# Altium PCB FBD_11A.PCBDOC
Units mil, origin at the board's own origin, x right, y up, seen from the top; angles counter-clockwise.
Board outline 6850 x 4575 mil, 2 copper layers (TopLayer, BottomLayer); 87 components, 0 nets, 459 pads, 0 vias.
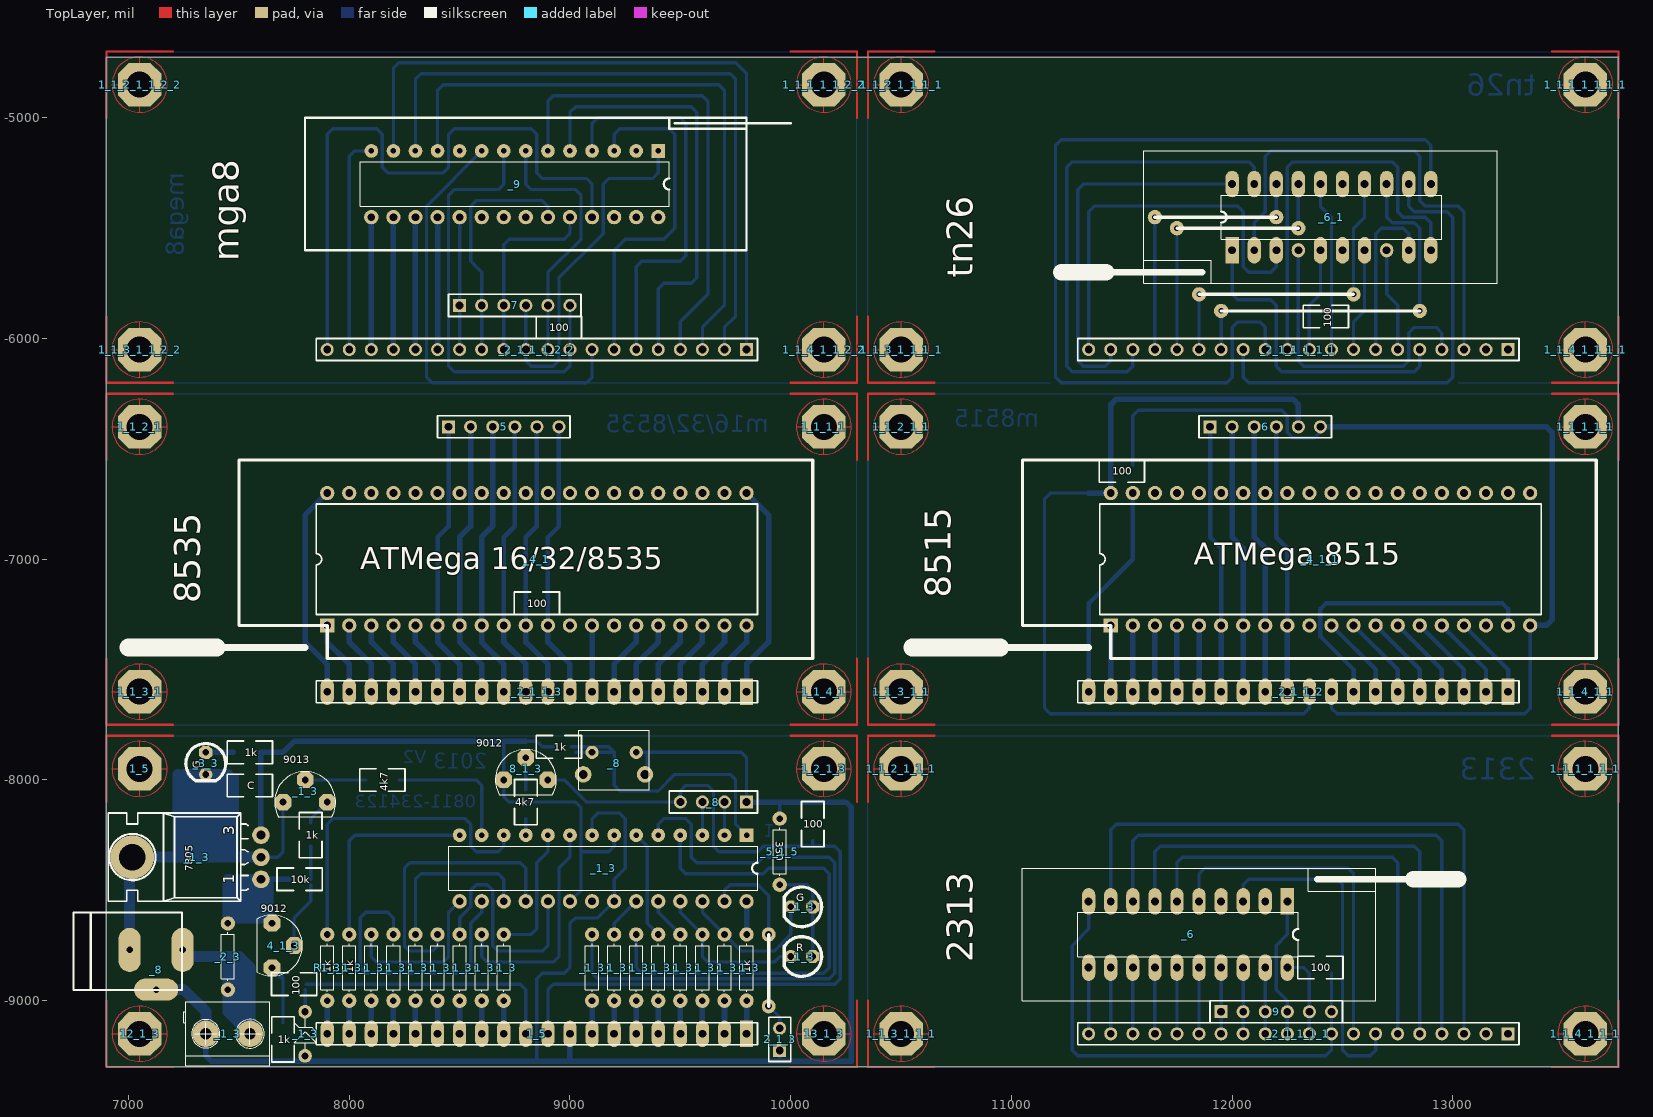
[diagram p0: TopLayer view]
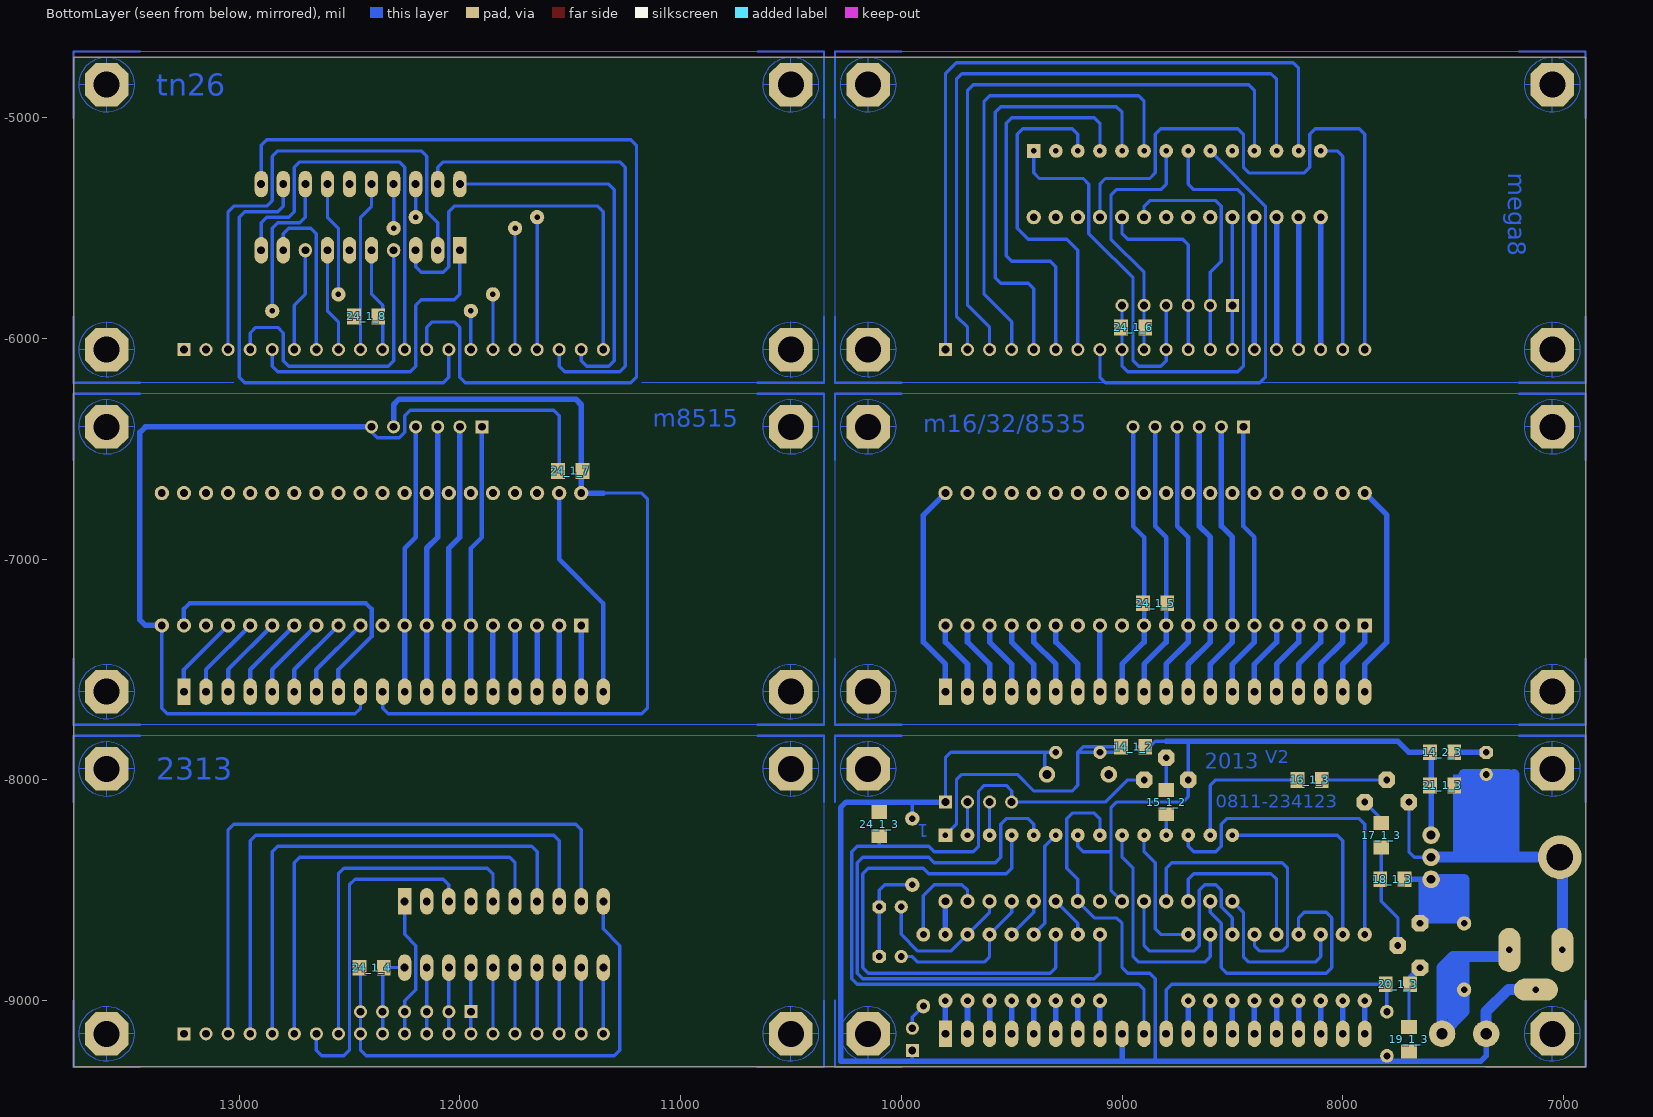
[diagram p1: BottomLayer view, seen from below]

## Layer stack, top to bottom
TopLayer: signal copper 1.4
Dielectric: dielectric 12.6, FR-4, Dk 4.8
BottomLayer: signal copper 1.4

## Board outline
6900,-4725 13750,-4725 13750,-9300 6900,-9300

## Design rules (kind name [scope] priority, off if disabled: settings)
Clearance [All] p1: gap=25
ComponentClearance [All] p1: gap=10 collisioncheckmode=0
PolygonConnect [All] p1: connectstyle=Relief reliefconductorwidth=10 reliefentries=4 polygonreliefangle="90 Angle"
RoutingLayers [All] p1: top layer=Horizontal bottom layer=Vertical
RoutingVias [All] p1: holewidth=28 width=50 viastyle="Through Hole" minholewidth=28 minwidth=50 maxholewidth=28 maxwidth=50
SolderMaskExpansion [All] p1: expansion=4
TestPointUsage [All] p1: valid=0 allowmultiple=FALSE
Testpoint [All] p1: side=15 testpointundercomponent=TRUE minsize=40 maxsize=100 preferedsize=60 minholesize=20 maxholesize=40 preferedholesize=32 testpointgrid=1 style=1023 order=1234567890
Width [All] p1: maxlimit=10 minlimit=10 preferedwidth=10
16 further rules are at their usual default settings.

## Components (designator, comment, footprint, x,y, rotation, side; value= is the part's Value field where it differs from the comment)
1_1_1_1 "CX" CORNER3 10150,-6400 r0 top
1_1_1_1_1 "CX" CORNER3 13600,-6400 r0 top
1_1_1_1_1_1 "CX" CORNER3 13600,-7950 r0 top
1_1_1_1_1_1_1 "CX" CORNER3 13600,-4850 r0 top
1_1_1_1_1_2_2 "CX" CORNER3 10150,-4850 r0 top
1_1_2_1 "CX" CORNER3 7050,-6400 r90 top
1_1_2_1_1 "CX" CORNER3 10500,-6400 r90 top
1_1_2_1_1_1 "CX" CORNER3 10500,-7950 r90 top
1_1_2_1_1_1_1 "CX" CORNER3 10500,-4850 r90 top
1_1_2_1_1_2_2 "CX" CORNER3 7050,-4850 r90 top
1_1_3_1 "CX" CORNER3 7050,-7600 r180 top
1_1_3_1_1 "CX" CORNER3 10500,-7600 r180 top
1_1_3_1_1_1 "CX" CORNER3 10500,-9150 r180 top
1_1_3_1_1_1_1 "CX" CORNER3 10500,-6050 r180 top
1_1_3_1_1_2_2 "CX" CORNER3 7050,-6050 r180 top
1_1_4_1 "CX" CORNER3 10150,-7600 r270 top
1_1_4_1_1 "CX" CORNER3 13600,-7600 r270 top
1_1_4_1_1_1 "CX" CORNER3 13600,-9150 r270 top
1_1_4_1_1_1_1 "CX" CORNER3 13600,-6050 r270 top
1_1_4_1_1_2_2 "CX" CORNER3 10150,-6050 r270 top
1_2_1_3 "CX" CORNER3 10150,-7950 r0 top
1_5 "CX" CORNER3 7050,-7950 r90 top
1_5 "" HDR1X20#1 9800,-9150 r180 top
2_1_3 "" HDR1X2 9950,-9225 r90 top
4_1_3 "9012" TO92-2 7650,-8650 r0 top
5 "" HDR1X6 8450,-6400 r0 top
6 "" HDR1X6 11900,-6400 r0 top
7 "" HDR1X6 8500,-5850 r0 top
8_1_3 "9012" TO92-2 8700,-8000 r90 top
9 "" HDR1X6 11950,-9050 r0 top
12_1_3 "CX" CORNER3 7050,-9150 r180 top
13_1_3 "CX" CORNER3 10150,-9150 r270 top
14_1_2 "1k" C3216-1206 8950,-7850 r180 top
14_2_3 "1k" C3216-1206 7550,-7875 r180 top
15_1_2 "4k7" C3216-1206 8800,-8100 r90 top
16_1_3 "4k7" C3216-1206 8150,-8000 r0 top
17_1_3 "1k" C3216-1206 7825,-8250 r90 top
18_1_3 "10k" C3216-1206 7775,-8450 r0 top
19_1_3 "1k" C3216-1206 7700,-9175 r90 top
20_1_3 "100" C3216-1206 7750,-8925 r180 top
21_1_3 "C" C3216-1206 7550,-8025 r180 top
24_1_3 "100" C3216-1206 10100,-8200 r90 top
24_1_4 "100" C3216-1206 12400,-8850 r180 top
24_1_5 "100" C3216-1206 8850,-7200 r180 top
24_1_6 "100" C3216-1206 8950,-5950 r180 top
24_1_7 "100" C3216-1206 11500,-6600 r180 top
24_1_8 "100" C3216-1206 12425,-5900 r0 top
_1_3 "" TERMINAL2P 7350,-9150 r270 top
_1_3 "9013" TO92-2 7700,-8100 r90 top
_1_3 "7805" TO220H 7600,-8450 r90 top
_1_3 "R" LED1 10100,-8800 r90 top
_1_3 "G" LED1 10100,-8575 r90 top
_1_3 "" DIP28S 9800,-8250 r270 top
_1_3 "1k" AXIAL0.3 8000,-9000 r90 top
_1_3 "" AXIAL0.3 8100,-9000 r90 top
_1_3 "" AXIAL0.3 8200,-9000 r90 top
_1_3 "" AXIAL0.3 8300,-9000 r90 top
_1_3 "" AXIAL0.3 8400,-9000 r90 top
_1_3 "" AXIAL0.3 8500,-9000 r90 top
_1_3 "" AXIAL0.3 8600,-9000 r90 top
_1_3 "" AXIAL0.3 8700,-9000 r90 top
_1_3 "1k" AXIAL0.3 9800,-9000 r90 top
_1_3 "" AXIAL0.3 9700,-9000 r90 top
_1_3 "" AXIAL0.3 9600,-9000 r90 top
_1_3 "" AXIAL0.3 9500,-9000 r90 top
_1_3 "" AXIAL0.3 9400,-9000 r90 top
_1_3 "" AXIAL0.3 9300,-9000 r90 top
_1_3 "" AXIAL0.3 9200,-9000 r90 top
_1_3 "" AXIAL0.3 9100,-9000 r90 top
_1_3 "" DZ2 7800,-9250 r90 top
_2_1_1_1_1 "" HDR1X20#2 13250,-9150 r180 top
_2_1_1_1_1_1 "" HDR1X20#2 13250,-6050 r180 top
_2_1_1_1_2_2 "" HDR1X20#2 9800,-6050 r180 top
_2_1_1_2 "" HDR1X20#1 13250,-7600 r180 top
_2_1_1_3 "" HDR1X20#1 9800,-7600 r180 top
_2_3 "" AXIAL0.3 7450,-8950 r90 top
_3_3 "G" LED1 7350,-7875 r180 top
_4_1 "ATMega 16/32/8535" "DIP40 - ZIP" 7900,-7300 r90 top
_4_1_1 "ATMega 8515" "DIP40 - ZIP" 11450,-7300 r90 top
_5_1_5 "330" AXIAL0.3 9950,-8175 r270 top
_6 "" DIP20TT#1 12250,-8550 r270 top
_6_1 "" DIP20TT#2 12000,-5600 r90 top
_8 "" SW5_SIDE 9300,-7875 r180 top
_8 "" DCPL1 7125,-8950 r90 top
_8 "" HDR1X4 9800,-8100 r180 top
_9 "" DIP28S 9400,-5150 r270 top
R1_3 "1k" AXIAL0.3 7900,-9000 r90 top

## Footprints (in the part's own frame and the unit in brackets; to place one, negate y for a bottom-side part, rotate by r counter-clockwise, add the part's x,y. Pads: shape width x height; smd on the part's side, far side on the other; paste and mask are expansions set on the pad)
AXIAL0.3 [mil]
  round 65 hole 30: 1(0,0) 2(300,0)
  silkscreen extent 41,-30 259,30
C3216-1206 [mm]
  rect 1.6x1.8 smd far side: 1(-1.4,0) 2(1.4,0)
  silkscreen extent -2.6,-1.3 2.6,1.3
CORNER3 [mm]
  oct 5x5 hole 3: +(0,0)
  MultiLayer circle w0.127: c0,0 r3.175
  MultiLayer lines w0.127: -3.175,0 -1.905,0 ; 0,-3.175 0,-1.905 ; 0,1.905 0,3.175 ; 1.905,0 3.175,0
  MultiLayer lines w0.254: -3.81,3.81 3.81,3.81 3.81,-3.81
DCPL1 [mil]
  oval 100x200 hole 30: 0(0,0)
  oval 200x100 hole 30: 1(180,-120) 2(180,120)
  silkscreen extent -1,-117 349,374
DIP20TT#1 [mil]
  rect 120x60 hole 36: 1(0,0)
  oval 120x60 hole 36: 2(0,-100) 3(0,-200) 4(0,-300) 5(0,-400) 6(0,-500) 7(0,-600) 8(0,-700) 9(0,-800) 10(0,-900) 11(300,-900) 12(300,-800) 13(300,-700) 14(300,-600) 15(300,-500) 16(300,-400) 17(300,-300) 18(300,-200) 19(300,-100) 20(300,0)
  silkscreen extent -150,-1200 450,775
DIP20TT#2 [mil]
  rect 120x60 hole 36: 1(0,0)
  oval 120x60 hole 36: 2(0,-100) 3(0,-200) 5(0,-400) 6(0,-500) 7(0,-600) 9(0,-800) 10(0,-900) 11(300,-900) 12(300,-800) 13(300,-700) 14(300,-600) 15(300,-500) 16(300,-400) 17(300,-300) 18(300,-200) 19(300,-100) 20(300,0)
  oval 65x60 hole 36: 4(0,-300) 8(0,-700)
  silkscreen extent -150,-1200 450,775
DIP28S [mil]
  rect 62x62 hole 25: 1(0,0)
  round 62 hole 25: 2(0,-100) 3(0,-200) 4(0,-300) 5(0,-400) 6(0,-500) 7(0,-600) 8(0,-700) 9(0,-800) 10(0,-900) 11(0,-1000) 12(0,-1100) 13(0,-1200) 14(0,-1300)
  round 65 hole 35: 15(300,-1300) 16(300,-1200) 17(300,-1100) 18(300,-1000) 19(300,-900) 20(300,-800) 21(300,-700) 22(300,-600) 23(300,-500) 24(300,-400) 25(300,-300) 26(300,-200) 27(300,-100) 28(300,0)
  silkscreen extent 50,-1350 250,50
"DIP40 - ZIP" [mil]
  rect 65x65 hole 35: 1(0,0)
  round 65 hole 35: 2(0,-100) 3(0,-200) 4(0,-300) 5(0,-400) 6(0,-500) 7(0,-600) 8(0,-700) 9(0,-800) 10(0,-900) 11(0,-1000) 12(0,-1100) 13(0,-1200) 14(0,-1300) 15(0,-1400) 16(0,-1500) 17(0,-1600) 18(0,-1700) 19(0,-1800) 20(0,-1900) 21(600,-1900) 22(600,-1800) 23(600,-1700) 24(600,-1600) 25(600,-1500) 26(600,-1400) 27(600,-1300) 28(600,-1200) 29(600,-1100) 30(600,-1000) 31(600,-900) 32(600,-800) 33(600,-700) 34(600,-600) 35(600,-500) 36(600,-400) 37(600,-300) 38(600,-200) 39(600,-100) 40(600,0)
  silkscreen extent -150,-2200 750,900
DZ2 [mil]
  round 62 hole 32: 1(0,0) 2(200,0)
  silkscreen extent 30,-50 170,50
HDR1X2 [mm]
  rect 1.5x1.5 hole 0.9: 1(0,0)
  round 1.5 hole 0.9: 2(2.54,0)
  silkscreen extent -1.27,-1.27 3.81,1.27
HDR1X4 [mm]
  rect 1.5x1.5 hole 0.9: 1(0,0)
  round 1.5 hole 0.9: 2(2.54,0) 3(5.08,0) 4(7.62,0)
  silkscreen extent -1.27,-1.27 8.89,1.27
HDR1X6 [mm]
  rect 1.5x1.5 hole 0.9: 1(0,0)
  round 1.5 hole 0.9: 2(2.54,0) 3(5.08,0) 4(7.62,0) 5(10.16,0) 6(12.7,0)
  silkscreen extent -1.27,-1.27 13.97,1.27
HDR1X20#1 [mil]
  rect 60x120 hole 35.43: 1(0,0)
  oval 60x120 hole 35.43: 2(100,0) 3(200,0) 4(300,0) 5(400,0) 6(500,0) 7(600,0) 8(700,0) 9(800,0) 10(900,0) 11(1000,0) 12(1100,0) 13(1200,0) 14(1300,0) 15(1400,0) 16(1500,0) 17(1600,0) 18(1700,0) 19(1800,0) 20(1900,0)
  silkscreen extent -50,-50 1950,50
HDR1X20#2 [mil]
  rect 59.06x59.06 hole 35.43: 1(0,0)
  round 59.06 hole 35.43: 2(100,0) 3(200,0) 4(300,0) 5(400,0) 6(500,0) 7(600,0) 8(700,0) 9(800,0) 10(900,0) 11(1000,0) 12(1100,0) 13(1200,0) 14(1300,0) 15(1400,0) 16(1500,0) 17(1600,0) 18(1700,0) 19(1800,0) 20(1900,0)
  silkscreen extent -50,-50 1950,50
LED1 [mil]
  oct 60x60 hole 30: A(0,0)
  round 60 hole 30: K(0,100)
  silkscreen extent -90,-40 90,129
SW5_SIDE [mil]
  round 75 hole 40: 0(-40,100) 1(240,100)
  round 60 hole 30: 0(0,0) 1(200,0)
  silkscreen extent -60,-100 260,170
TERMINAL2P [mil]
  round 120 hole 51.18: 1(0,0) 3(0,200)
  silkscreen extent -145,-100 145,290
TO92-2 [mil]
  oct 75x75 hole 30: B(100,-100) c(0,-200) e(0,0)
  silkscreen extent -68,-238 138,38
TO220H [mil]
  round 196.85 hole 118.11: 0(100,583.33)
  round 80 hole 40: 1(0,0) 2(100,0) 3(200,0)
  silkscreen extent -100,59 300,692

## Free pads (board coordinates)
  oval 62x65 hole 32: 0(9900,-8700) 1(9900,-9025)
  round 65 hole 25: 0(12300,-5500) 1(11750,-5500) 2(12200,-5450) 3(11650,-5450) 4(11850,-5800) 5(12550,-5800) 6(12550,-5800) 7(11950,-5875) 8(12850,-5875)

## Nets (pads, with @x,y where several pads share a name; then routed paths per layer and width w, separated by ;. In a path a pad name is that pad's centre, name@x,y a point inside that pad or via, vN(x,y) a via of type N, cw(c..) or ccw(c..) an arc to the next point about the centre after c; other vN are vias at no path point)
pads on no net: 1_1_1_1.+ 1_1_1_1_1.+ 1_1_1_1_1_1.+ 1_1_1_1_1_1_1.+ 1_1_1_1_1_2_2.+ 1_1_2_1.+ 1_1_2_1_1.+ 1_1_2_1_1_1.+ 1_1_2_1_1_1_1.+ 1_1_2_1_1_2_2.+ 1_1_3_1.+ 1_1_3_1_1.+ 1_1_3_1_1_1.+ 1_1_3_1_1_1_1.+ 1_1_3_1_1_2_2.+ 1_1_4_1.+ 1_1_4_1_1.+ 1_1_4_1_1_1.+ 1_1_4_1_1_1_1.+ 1_1_4_1_1_2_2.+ 1_2_1_3.+ 1_5.1 1_5.2 1_5.3 1_5.4 1_5.5 1_5.6 1_5.7 1_5.8 1_5.9 1_5.10 1_5.11 1_5.12 1_5.13 1_5.14 1_5.15 1_5.16 1_5.17 1_5.18 1_5.19 1_5.20 1_5.+ 2_1_3.1 2_1_3.2 4_1_3.B 4_1_3.c 4_1_3.e 5.1 5.2 5.3 5.4 5.5 5.6 6.1 6.2 6.3 6.4 6.5 6.6 7.1 7.2 7.3 7.4 7.5 7.6 8_1_3.B 8_1_3.c 8_1_3.e 9.1 9.2 9.3 9.4 9.5 9.6 12_1_3.+ 13_1_3.+ 14_1_2.1 14_1_2.2 14_2_3.1 14_2_3.2 15_1_2.1 15_1_2.2 16_1_3.1 16_1_3.2 17_1_3.1 17_1_3.2 18_1_3.1 18_1_3.2 19_1_3.1 19_1_3.2 20_1_3.1 20_1_3.2 21_1_3.1 21_1_3.2 24_1_3.1 24_1_3.2 24_1_4.1 24_1_4.2 24_1_5.1 24_1_5.2 24_1_6.1 24_1_6.2 24_1_7.1 24_1_7.2 24_1_8.1 24_1_8.2 _1_3.0 _1_3.1 _1_3.2 _1_3.3 _1_3.4 _1_3.5 _1_3.6 _1_3.7 _1_3.8 _1_3.9 _1_3.10 _1_3.11 _1_3.12 _1_3.13 _1_3.14 _1_3.15 _1_3.16 _1_3.17 _1_3.18 _1_3.19 _1_3.20 _1_3.21 _1_3.22 _1_3.23 _1_3.24 _1_3.25 _1_3.26 _1_3.27 _1_3.28 _1_3.A _1_3.B _1_3.c _1_3.e _1_3.K _2_1_1_1_1.1 _2_1_1_1_1.2 _2_1_1_1_1.3 _2_1_1_1_1.4 _2_1_1_1_1.5 _2_1_1_1_1.6 _2_1_1_1_1.7 _2_1_1_1_1.8 _2_1_1_1_1.9 _2_1_1_1_1.10 _2_1_1_1_1.11 _2_1_1_1_1.12 _2_1_1_1_1.13 _2_1_1_1_1.14 _2_1_1_1_1.15 _2_1_1_1_1.16 _2_1_1_1_1.17 _2_1_1_1_1.18 _2_1_1_1_1.19 _2_1_1_1_1.20 _2_1_1_1_1_1.1 _2_1_1_1_1_1.2 _2_1_1_1_1_1.3 _2_1_1_1_1_1.4 _2_1_1_1_1_1.5 _2_1_1_1_1_1.6 _2_1_1_1_1_1.7 _2_1_1_1_1_1.8 _2_1_1_1_1_1.9 _2_1_1_1_1_1.10 _2_1_1_1_1_1.11 _2_1_1_1_1_1.12 _2_1_1_1_1_1.13 _2_1_1_1_1_1.14 _2_1_1_1_1_1.15 _2_1_1_1_1_1.16 _2_1_1_1_1_1.17 _2_1_1_1_1_1.18 _2_1_1_1_1_1.19 _2_1_1_1_1_1.20 _2_1_1_1_2_2.1 _2_1_1_1_2_2.2 _2_1_1_1_2_2.3 _2_1_1_1_2_2.4 _2_1_1_1_2_2.5 _2_1_1_1_2_2.6 _2_1_1_1_2_2.7 _2_1_1_1_2_2.8 _2_1_1_1_2_2.9 _2_1_1_1_2_2.10 _2_1_1_1_2_2.11 _2_1_1_1_2_2.12 _2_1_1_1_2_2.13 _2_1_1_1_2_2.14 _2_1_1_1_2_2.15 _2_1_1_1_2_2.16 _2_1_1_1_2_2.17 _2_1_1_1_2_2.18 _2_1_1_1_2_2.19 _2_1_1_1_2_2.20 _2_1_1_2.1 _2_1_1_2.2 _2_1_1_2.3 _2_1_1_2.4 _2_1_1_2.5 _2_1_1_2.6 _2_1_1_2.7 _2_1_1_2.8 _2_1_1_2.9 _2_1_1_2.10 _2_1_1_2.11 _2_1_1_2.12 _2_1_1_2.13 _2_1_1_2.14 _2_1_1_2.15 _2_1_1_2.16 _2_1_1_2.17 _2_1_1_2.18 _2_1_1_2.19 _2_1_1_2.20 _2_1_1_3.1 _2_1_1_3.2 _2_1_1_3.3 _2_1_1_3.4 _2_1_1_3.5 _2_1_1_3.6 _2_1_1_3.7 _2_1_1_3.8 _2_1_1_3.9 _2_1_1_3.10 _2_1_1_3.11 _2_1_1_3.12 _2_1_1_3.13 _2_1_1_3.14 _2_1_1_3.15 _2_1_1_3.16 _2_1_1_3.17 _2_1_1_3.18 _2_1_1_3.19 _2_1_1_3.20 _2_3.1 _2_3.2 _3_3.A _3_3.K _4_1.1 _4_1.2 _4_1.3 _4_1.4 _4_1.5 _4_1.6 _4_1.7 _4_1.8 _4_1.9 _4_1.10 _4_1.11 _4_1.12 _4_1.13 _4_1.14 _4_1.15 _4_1.16 _4_1.17 _4_1.18 _4_1.19 _4_1.20 _4_1.21 _4_1.22 _4_1.23 _4_1.24 _4_1.25 _4_1.26 _4_1.27 _4_1.28 _4_1.29 _4_1.30 _4_1.31 _4_1.32 _4_1.33 _4_1.34 _4_1.35 _4_1.36 _4_1.37 _4_1.38 _4_1.39 _4_1.40 _4_1_1.1 _4_1_1.2 _4_1_1.3 _4_1_1.4 _4_1_1.5 _4_1_1.6 _4_1_1.7 _4_1_1.8 _4_1_1.9 _4_1_1.10 _4_1_1.11 _4_1_1.12 _4_1_1.13 _4_1_1.14 _4_1_1.15 _4_1_1.16 _4_1_1.17 _4_1_1.18 _4_1_1.19 _4_1_1.20 _4_1_1.21 _4_1_1.22 _4_1_1.23 _4_1_1.24 _4_1_1.25 _4_1_1.26 _4_1_1.27 _4_1_1.28 _4_1_1.29 _4_1_1.30 _4_1_1.31 _4_1_1.32 _4_1_1.33 _4_1_1.34 _4_1_1.35 _4_1_1.36 _4_1_1.37 _4_1_1.38 _4_1_1.39 _4_1_1.40 _5_1_5.1 _5_1_5.2 _6.1 _6.2 _6.3 _6.4 _6.5 _6.6 _6.7 _6.8 _6.9 _6.10 _6.11 _6.12 _6.13 _6.14 _6.15 _6.16 _6.17 _6.18 _6.19 _6.20 _6_1.1 _6_1.2 _6_1.3 _6_1.4 _6_1.5 _6_1.6 _6_1.7 _6_1.8 _6_1.9 _6_1.10 _6_1.11 _6_1.12 _6_1.13 _6_1.14 _6_1.15 _6_1.16 _6_1.17 _6_1.18 _6_1.19 _6_1.20 _8.0 _8.1 _8.2 _8.3 _8.4 _9.1 _9.2 _9.3 _9.4 _9.5 _9.6 _9.7 _9.8 _9.9 _9.10 _9.11 _9.12 _9.13 _9.14 _9.15 _9.16 _9.17 _9.18 _9.19 _9.20 _9.21 _9.22 _9.23 _9.24 _9.25 _9.26 _9.27 _9.28 R1_3.1 R1_3.2
copper on no net: | length 192600.4
  BottomLayer w5: 6900,-9000 6900,-8075 ; 6900,-7475 6900,-6550 ; 6900,-5900 6900,-5000 ; 7200,-7800 10000,-7800 ; 7200,-7750 10025,-7750 ; 7200,-6250 10000,-6250 ; 7200,-6200 10000,-6200 ; 7200,-4700 10000,-4700 ; 10300,-7450 10300,-6550 ; 10300,-5900 10300,-5000 ; 10350,-9000 10350,-8100 ; 10350,-5900 10350,-5000 ; 10650,-9300 13450,-9300 ; 10650,-7800 13450,-7800 ; 10650,-7750 13450,-7750 ; 10650,-6250 13450,-6250 ; 10650,-6200 11175,-6200 ; 10650,-4700 13450,-4700 ; 13025,-6200 13450,-6200 ; 13750,-9000 13750,-8100 ; 13750,-7450 13750,-6550 ; 13750,-5900 13750,-5000
  BottomLayer w10: 7200,-9300 7350,-9300 ; 10350,-7450 10350,-6550
  BottomLayer w15: 7600,-8450 7625,-8450 ; 7605.12,-8355.12 7600,-8350 7675,-8350 7700,-8325 7700,-8100 ; 7650,-8850 7700,-8900 7700,-9100 ; 7650,-8650 7650,-8625 7650,-8444.88 ; 7750,-8750 7750,-8625 7825,-8550 7825,-8475 ; 7800,-9050 7800,-8950 ; 7800,-8000 8075,-8000 ; 7805.12,-8925 8775,-8925 8800,-8950 8800,-9150 ; 7825,-8450 7825,-8300 ; 7825,-8194.88 7825,-8175 7900,-8100 ; 7900,-8700 7900,-8200 7925,-8175 8525,-8175 8550,-8200 8550,-8300 8575,-8325 8675,-8325 8700,-8300 8700,-8250 ; 7900,-6050 7900,-5075 7925,-5050 8125,-5050 8150,-5075 8150,-5225 8175,-5250 8425,-5250 8450,-5225 8450,-5075 8475,-5050 8825,-5050 8850,-5075 8850,-5250 8875,-5275 9075,-5275 9100,-5300 9100,-5350 9100,-5450 ; 8000,-8700 8000,-8550 8000,-8275 8025,-8250 8500,-8250 ; 8000,-6050 8000,-5175 8025,-5150 8100,-5150 ; 8100,-8700 8100,-8800 8125,-8825 8425,-8825 8450,-8800 8450,-8600 8500,-8550 ; 8200,-8700 8200,-8625 8175,-8600 8075,-8600 8050,-8625 8050,-8850 8075,-8875 8525,-8875 8550,-8850 8550,-8650 8600,-8600 8600,-8550 ; 8200,-5150 8200,-4775 8225,-4750 9750,-4750 9800,-4800 9800,-5975 9800,-6050 ; 8225,-8000 8575,-8000 8600,-8025 8600,-8250 ; 8300,-8700 8300,-8450 8325,-8425 8675,-8425 8700,-8450 8700,-8550 ; 8300,-5150 8300,-4825 8325,-4800 9725,-4800 9750,-4825 9750,-5900 9700,-5950 9700,-6050 ; 8400,-8700 8400,-8750 8375,-8775 8275,-8775 8250,-8750 8250,-8400 8275,-8375 8775,-8375 8800,-8400 8800,-8550 ; 8400,-5150 8400,-4875 8425,-4850 9675,-4850 9700,-4875 9700,-5850 9600,-5950 9600,-6050 ; 8500,-8700 8500,-8625 8550,-8575 8550,-8500 8575,-8475 8625,-8475 8650,-8500 8650,-8750 8675,-8775 8875,-8775 8900,-8750 8900,-8550 ; 8500,-6050 8500,-5450 ; 8600,-8700 8600,-8750 8600,-8800 8625,-8825 8925,-8825 8950,-8800 8950,-8400 9000,-8350 9000,-8250 ; 8600,-6050 8600,-5700 8550,-5650 8550,-5400 8575,-5375 8875,-5375 8900,-5400 8900,-5450 ; 8600,-5150 8350,-5400 8350,-6175 8375,-6200 9075,-6200 9100,-6175 9100,-6050 ; 8700,-8700 8825,-8700 8850,-8675 8850,-8375 8900,-8325 8900,-8250 ; 8700,-8050 8700,-7825 ; 8700,-8025 8700,-8075 8725,-8100 9025,-8100 9050,-8125 9050,-8350 ; 8700,-6050 8700,-5575 8725,-5550 8975,-5550 9000,-5525 9000,-5450 ; 8700,-5150 8700,-5300 8675,-5325 8475,-5325 8450,-5350 8450,-6125 8475,-6150 8975,-6150 9000,-6125 9000,-5850 ; 8800,-8250 8800,-8175 ; 8800,-8044.88 8800,-7900 ; 8800,-7825 8850,-7825 8875,-7850 8925,-7850 ; 8800,-5850 8800,-6100 8825,-6125 8925,-6125 8950,-6100 8950,-5725 9125,-5550 9150,-5525 9150,-5300 9175,-5275 9375,-5275 9400,-5250 9400,-5150 ; 8800,-5150 8800,-5300 8825,-5325 9025,-5325 9050,-5350 9050,-5550 8900,-5700 8900,-6050 ; 8850,-9275 8850,-8900 8875,-8875 8975,-8875 9000,-8850 9000,-8650 9025,-8625 9125,-8625 9200,-8550 9200,-8450 9250,-8400 9250,-8175 9225,-8150 9125,-8150 9100,-8175 9100,-8250 ; 8900,-9150 8900,-8950 8925,-8925 10200,-8925 10225,-8900 10225,-8325 10200,-8300 9875,-8300 9850,-8325 9675,-8325 9650,-8300 9650,-8050 9625,-8025 9525,-8025 9500,-8050 9500,-8100 9075,-8100 8975,-8000 8900,-8000 ; 8900,-5150 8900,-4925 8925,-4900 9600,-4900 9625,-4925 9625,-5800 9500,-5925 9500,-6050 ; 9000,-8550 9050,-8500 9050,-8350 ; 9000,-5150 9000,-4975 9025,-4950 9550,-4950 9575,-4975 9575,-5725 9550,-5750 9425,-5750 9400,-5775 9400,-6050 ; 9005.12,-7850 9175,-7850 9200,-7875 ; 9025,-7875 9200,-7875 ; 9050,-8325 9175,-8325 9200,-8300 9200,-8250 ; 9050,-8300 9050,-8350 ; 9100,-8700 9100,-8875 9125,-8900 10175,-8900 10200,-8875 10200,-8375 10175,-8350 9875,-8350 9850,-8375 9575,-8375 9550,-8350 9550,-8200 9525,-8175 9425,-8175 9400,-8200 9400,-8250 ; 9100,-5150 9100,-5025 9125,-5000 9500,-5000 9525,-5025 9525,-5625 9500,-5650 9325,-5650 9300,-5675 9300,-6050 ; 9200,-8700 9200,-8650 9300,-8550 ; 9200,-6050 9200,-5600 9250,-5550 9425,-5550 9475,-5500 9475,-5075 9450,-5050 9225,-5050 9200,-5075 9200,-5150 ; 9300,-8700 9300,-8850 9325,-8875 10150,-8875 10175,-8850 10175,-8425 10150,-8400 9900,-8400 9875,-8425 9525,-8425 9500,-8400 9500,-8250 ; 9300,-8250 9350,-8300 9350,-8650 9400,-8700 ; 9300,-7875 9775,-7875 9800,-7900 9800,-8100 ; 9350,-7990 9350,-7875 ; 9400,-8550 9400,-8600 9500,-8700 ; 9500,-8550 9500,-8600 9600,-8700 9600,-8800 9625,-8825 9925,-8825 9950,-8800 10000,-8800 ; 9600,-8550 9600,-8600 9700,-8700 9775,-8775 9875,-8775 9925,-8775 10000,-8700 10000,-8575 ; 9600,-8250 9600,-8100 ; 9700,-8550 9700,-8500 9725,-8475 9850,-8475 9900,-8525 9900,-8700 ; 9700,-8250 9700,-8100 ; 9800,-8250 9750,-8200 9750,-8000 9725,-7975 9475,-7975 9400,-8050 9225,-8050 9200,-8025 9200,-7875 ; 9900,-9025 9950,-9075 9950,-9125 ; 9950,-9275 9950,-9225 ; 9950,-8475 10075,-8475 10100,-8500 10100,-8800 ; 9950,-8175 9950,-8100 ; 10100,-8300 10100,-8275 ; 11350,-9150 11350,-8850 ; 11350,-8550 11350,-8675 11275,-8750 11275,-9225 11300,-9250 12425,-9250 12450,-9225 12450,-8875 ; 11350,-6700 11175,-6700 11150,-6725 11150,-7675 11175,-7700 12325,-7700 12350,-7675 12350,-7600 ; 11350,-6050 11350,-5425 11375,-5400 12025,-5400 12050,-5425 12050,-5675 12075,-5700 12175,-5700 12200,-5675 12200,-5600 ; 11450,-9150 11450,-8850 ; 11450,-8550 11450,-8225 11475,-8200 13025,-8200 13050,-8225 13050,-9150 ; 11450,-6050 11450,-6100 11425,-6125 11325,-6125 11300,-6100 11300,-5325 11325,-5300 12000,-5300 ; 11550,-9150 11550,-8850 ; 11550,-8550 11550,-8275 11575,-8250 12925,-8250 12950,-8275 12950,-9150 ; 11550,-6575 11550,-6350 11575,-6325 12225,-6325 12250,-6350 12250,-6425 12275,-6450 12375,-6450 12400,-6425 12400,-6400 ; 11550,-6050 11550,-6125 11525,-6150 11275,-6150 11250,-6125 11250,-5225 11275,-5200 12075,-5200 12100,-5225 12100,-5300 ; 11650,-9150 11650,-8850 ; 11650,-8550 11650,-8325 11675,-8300 12825,-8300 12850,-8325 12850,-9150 ; 11650,-6050 11650,-5450 ; 11750,-9150 11750,-8850 ; 11750,-8550 11750,-8375 11775,-8350 12725,-8350 12750,-8375 12750,-9150 ; 11750,-6050 11750,-5500 ; 11825,-5800 11850,-5825 11850,-6050 ; 11850,-9150 11850,-8850 ; 11850,-8550 11850,-8425 11875,-8400 12525,-8400 12550,-8425 12550,-8475 12550,-9150 ; 11950,-9150 11950,-8850 ; 11950,-6050 11950,-5875 ; 12000,-5600 12000,-5800 12025,-5825 12175,-5825 12200,-5850 12200,-6125 12225,-6150 12825,-6150 12850,-6125 12850,-6050 ; 12050,-9150 12050,-8850 ; 12050,-8550 12050,-8475 12075,-8450 12475,-8450 12500,-8475 12500,-9225 12525,-9250 12625,-9250 12650,-9225 12650,-9150 ; 12050,-6050 12050,-6175 12075,-6200 12975,-6200 13000,-6175 13000,-5450 12975,-5425 12825,-5425 12800,-5400 12800,-5300 ; 12100,-5600 12100,-5475 12150,-5425 12150,-5175 12175,-5150 12825,-5150 12850,-5175 12850,-5375 12875,-5400 13025,-5400 13050,-5425 13050,-6050 ; 12150,-9150 12150,-8850 ; 12150,-6050 12150,-5950 12125,-5925 12025,-5925 12000,-5950 12000,-6175 11975,-6200 11225,-6200 11200,-6175 11200,-5125 11225,-5100 12875,-5100 12900,-5125 12900,-5300 ; 12200,-5450 12200,-5275 ; 12250,-9150 12250,-9000 12200,-8950 12200,-8750 12250,-8700 12250,-8550 ; 12250,-8850 12325,-8850 12350,-8875 12350,-9150 ; 12250,-6050 12250,-5225 12275,-5200 12725,-5200 12750,-5225 12750,-5425 12775,-5450 12875,-5450 12900,-5475 12900,-5600 ; 12300,-5600 12300,-6100 12325,-6125 12775,-6125 12800,-6100 12800,-5975 12825,-5950 12925,-5950 12950,-5975 12950,-6050 ; 12300,-5500 12300,-5300 ; 12350,-6050 12350,-5850 12400,-5800 12400,-5600 ; 12400,-5300 12400,-5400 12450,-5450 12450,-6050 ; 12450,-7600 12450,-7675 12475,-7700 13325,-7700 13350,-7675 13350,-7300 ; 12550,-6050 12550,-5925 12600,-5875 12600,-5600 ; 12550,-5775 12550,-5500 12600,-5450 12600,-5300 ; 12650,-6050 12650,-5525 12675,-5500 12775,-5500 12800,-5525 12800,-5600 ; 12700,-5600 12700,-5800 12750,-5850 12750,-6050 ; 12700,-5300 12700,-5450 12725,-5475 12825,-5475 12850,-5500 12850,-5875
  BottomLayer w20: 8400,-7300 8400,-6900 8450,-6850 8450,-6400 ; 8700,-7300 8700,-6900 8750,-6850 8750,-6400 ; 8800,-7300 8800,-6900 8850,-6850 8850,-6400 ; 8900,-7300 8900,-6900 8950,-6850 8950,-6400 ; 11350,-7600 11350,-7200 11550,-7000 11550,-6700 ; 11900,-6400 11900,-6900 11950,-6950 11950,-7300 ; 12200,-6400 12200,-6900 12250,-6950 12250,-7275 ; 12450,-7300 12650,-7500 12650,-7600 ; 12550,-7600 12550,-7500 12400,-7350 12400,-7225 12425,-7200 13225,-7200 13250,-7225 13250,-7300 ; 12550,-7300 12750,-7500 12750,-7600 ; 12650,-7300 12850,-7500 12850,-7600 ; 12750,-7300 12950,-7500 12950,-7575 ; 12850,-7300 13050,-7500 13050,-7600 ; 12950,-7300 13150,-7500 13150,-7600 ; 13050,-7300 13250,-7500 13250,-7575
  BottomLayer w25: 7350,-9150 7350,-9250 7375,-9275 10275,-9275 10275,-8125 10250,-8100 9800,-8100 ; 7350,-7875 7475,-7875 ; 7600,-8450 7725,-8450 ; 7600,-8250 7600,-7875 ; 7605.12,-7875 7700,-7875 7750,-7825 8700,-7825 8800,-7825 ; 7650,-8850 7692.48,-8892.48 ; 7900,-9150 7900,-9000 ; 7900,-7600 7900,-7475 7800,-7375 7800,-6800 7900,-6700 ; 7900,-7300 7900,-7375 8000,-7475 8000,-7600 ; 8000,-9150 8000,-9000 ; 8000,-7300 8000,-7375 8100,-7475 8100,-7600 ; 8100,-9150 8100,-9000 ; 8100,-7300 8100,-7375 8200,-7475 8200,-7600 ; 8100,-6050 8100,-5450 ; 8200,-9150 8200,-9000 ; 8200,-7300 8200,-7375 8300,-7475 8300,-7600 ; 8200,-6050 8200,-5450 ; 8300,-9150 8300,-9000 ; 8300,-7300 8300,-7375 8400,-7475 8400,-7600 ; 8300,-6050 8300,-5450 ; 8400,-9150 8400,-9000 ; 8400,-7300 8400,-7375 8500,-7475 8500,-7600 ; 8400,-6050 8400,-5450 ; 8500,-9150 8500,-9000 ; 8500,-7300 8500,-7375 8600,-7475 8600,-7600 ; 8500,-7275 8500,-6900 8550,-6850 8550,-6400 ; 8600,-9150 8600,-9000 ; 8600,-7300 8600,-7375 8700,-7475 8700,-7600 ; 8600,-7275 8600,-6900 8650,-6850 8650,-6400 ; 8700,-9150 8700,-9000 ; 8700,-7300 8700,-7375 8800,-7475 8800,-7600 ; 8800,-7300 8800,-7375 8900,-7475 8900,-7600 ; 8900,-7300 8900,-7375 9000,-7475 9000,-7600 ; 9000,-9275 9000,-9150 ; 9100,-9150 9100,-9000 ; 9100,-7600 9100,-7300 ; 9200,-9150 9200,-9000 ; 9200,-7600 9200,-7475 9300,-7375 9300,-7300 ; 9300,-9150 9300,-9000 ; 9300,-7600 9300,-7475 9400,-7375 9400,-7300 ; 9400,-9150 9400,-9000 ; 9400,-7600 9400,-7475 9500,-7375 9500,-7300 ; 9500,-9150 9500,-9000 ; 9500,-7600 9500,-7475 9600,-7375 9600,-7300 ; 9600,-9150 9600,-9000 ; 9600,-7600 9600,-7475 9700,-7375 9700,-7300 ; 9700,-9150 9700,-9000 ; 9700,-7600 9700,-7475 9800,-7375 9800,-7300 ; 9800,-9150 9800,-9000 ; 9800,-8700 9800,-8550 ; 9800,-7600 9800,-7475 9900,-7375 9900,-6800 9800,-6700 ; 11350,-6700 11450,-6700 11450,-6300 11475,-6275 12275,-6275 12300,-6300 12300,-6400 ; 11450,-7600 11450,-7300 ; 11550,-7600 11550,-7300 ; 11650,-7600 11650,-7300 ; 11750,-7600 11750,-7300 ; 11850,-7600 11850,-7300 ; 11950,-7600 11950,-7300 ; 12000,-6400 12000,-6900 12050,-6950 12050,-7300 12050,-7600 ; 12100,-6400 12100,-6900 12150,-6950 12150,-7300 12150,-7600 ; 12250,-7600 12250,-7300 ; 12400,-6400 13425,-6400 13450,-6425 13450,-7275 13425,-7300 13350,-7300
  BottomLayer w50: 7005,-8770 7005,-8420 ; 7016.67,-8350 7600,-8350 ; 7125,-8950 7250,-8950 7350,-9050 7350,-9150 ; 7225,-8350 7225,-7975 ; 7250,-7975 7450,-7975 ; 7300,-8800 7500,-8800 7550,-8850 7550,-9150 7450,-9050 7450,-8950 ; 7450,-8925 7450,-8825 ; 7450,-8450 7600,-8450 ; 7500,-9075 7500,-8825

## Other copper
BottomLayer:
  region: 7650,-8450 7425,-8450 7425,-8650 7650,-8650
  rectangle: 7250,-8350 7500,-7975
  text "tn26" at 13375,-4900 h100
  text "mega8" at 7250,-5250 h80 r90
  text "m8515" at 11125,-6400 h80
  text "m16/32/8535" at 9900,-6425 h80
  text "V2" at 8350,-7925 h60
  text "2013" at 8625,-7950 h70
  text "2313" at 13375,-8000 h100
  text "0811-234123" at 8575,-8125 h60
  text "1" at 9875,-8200 h60 r180

## Silkscreen, mask and mechanical layers (free items; w line width, h text height)
TopOverlay:
  lines w10: 9450,-5000 9450,-5050 9800,-5050 ; 9475,-5025 10000,-5025 ; 7800,-5600 7800,-5000 9800,-5000 9800,-5600 7800,-5600
  lines w15: 9900,-9025 9900,-8700 ; 11650,-5450 12200,-5450 ; 11750,-5500 12300,-5500 ; 11850,-5800 12550,-5800 ; 11950,-5875 12850,-5875
  text "mga8" at 7500,-5650 h118.11 r90
  text "tn26" at 10825,-5725 h118.11 r90
  text "8515" at 10725,-7175 h118.11 r90
  text "8535" at 7325,-7200 h118.11 r90
  text "2313" at 10825,-8825 h118.11 r90

## Text inside footprints (layer, text, board x,y; h text height)
_1_3: TopOverlay "3" at 7480,-8250 h50 r90; TopOverlay "1" at 7480,-8470 h50 r90